# Allegro board F407_BIKE_V10A.brd
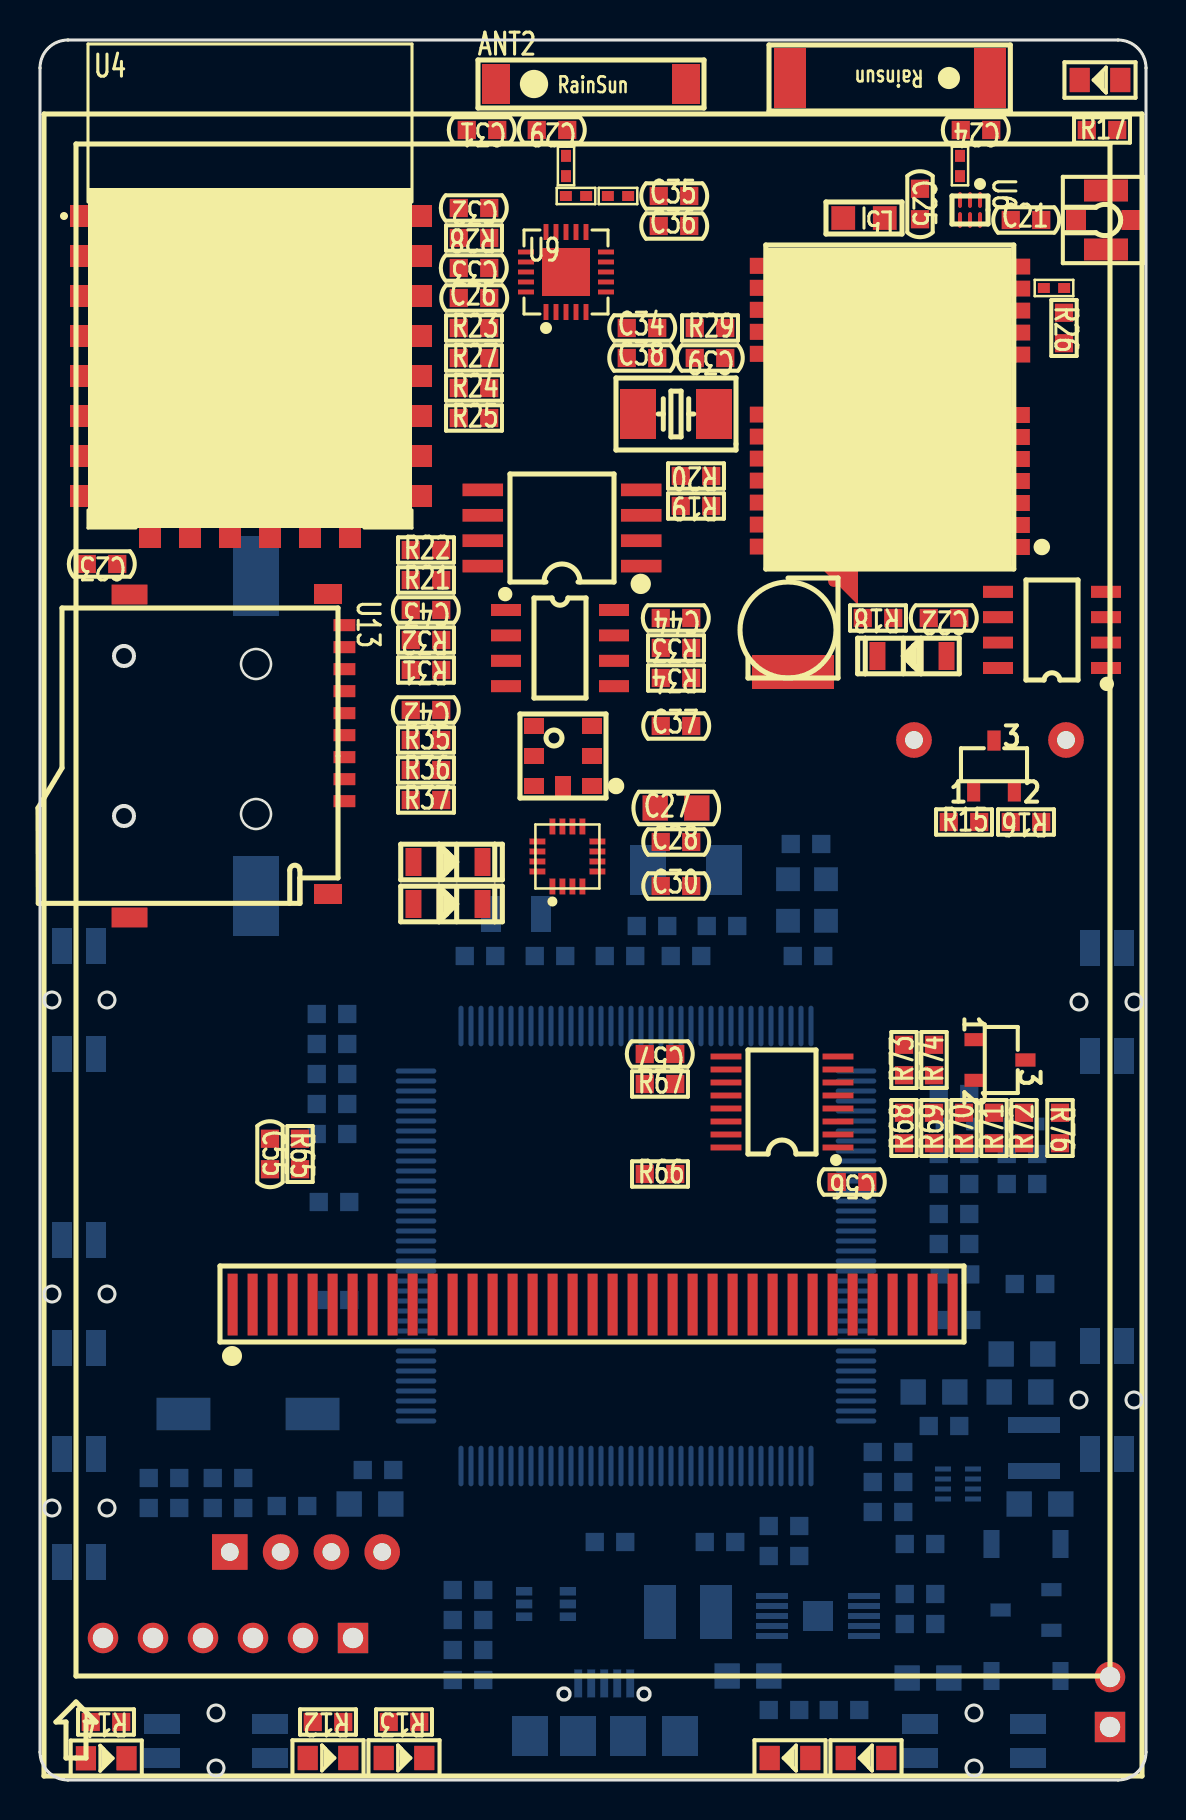
[diagram p0: board, top side]
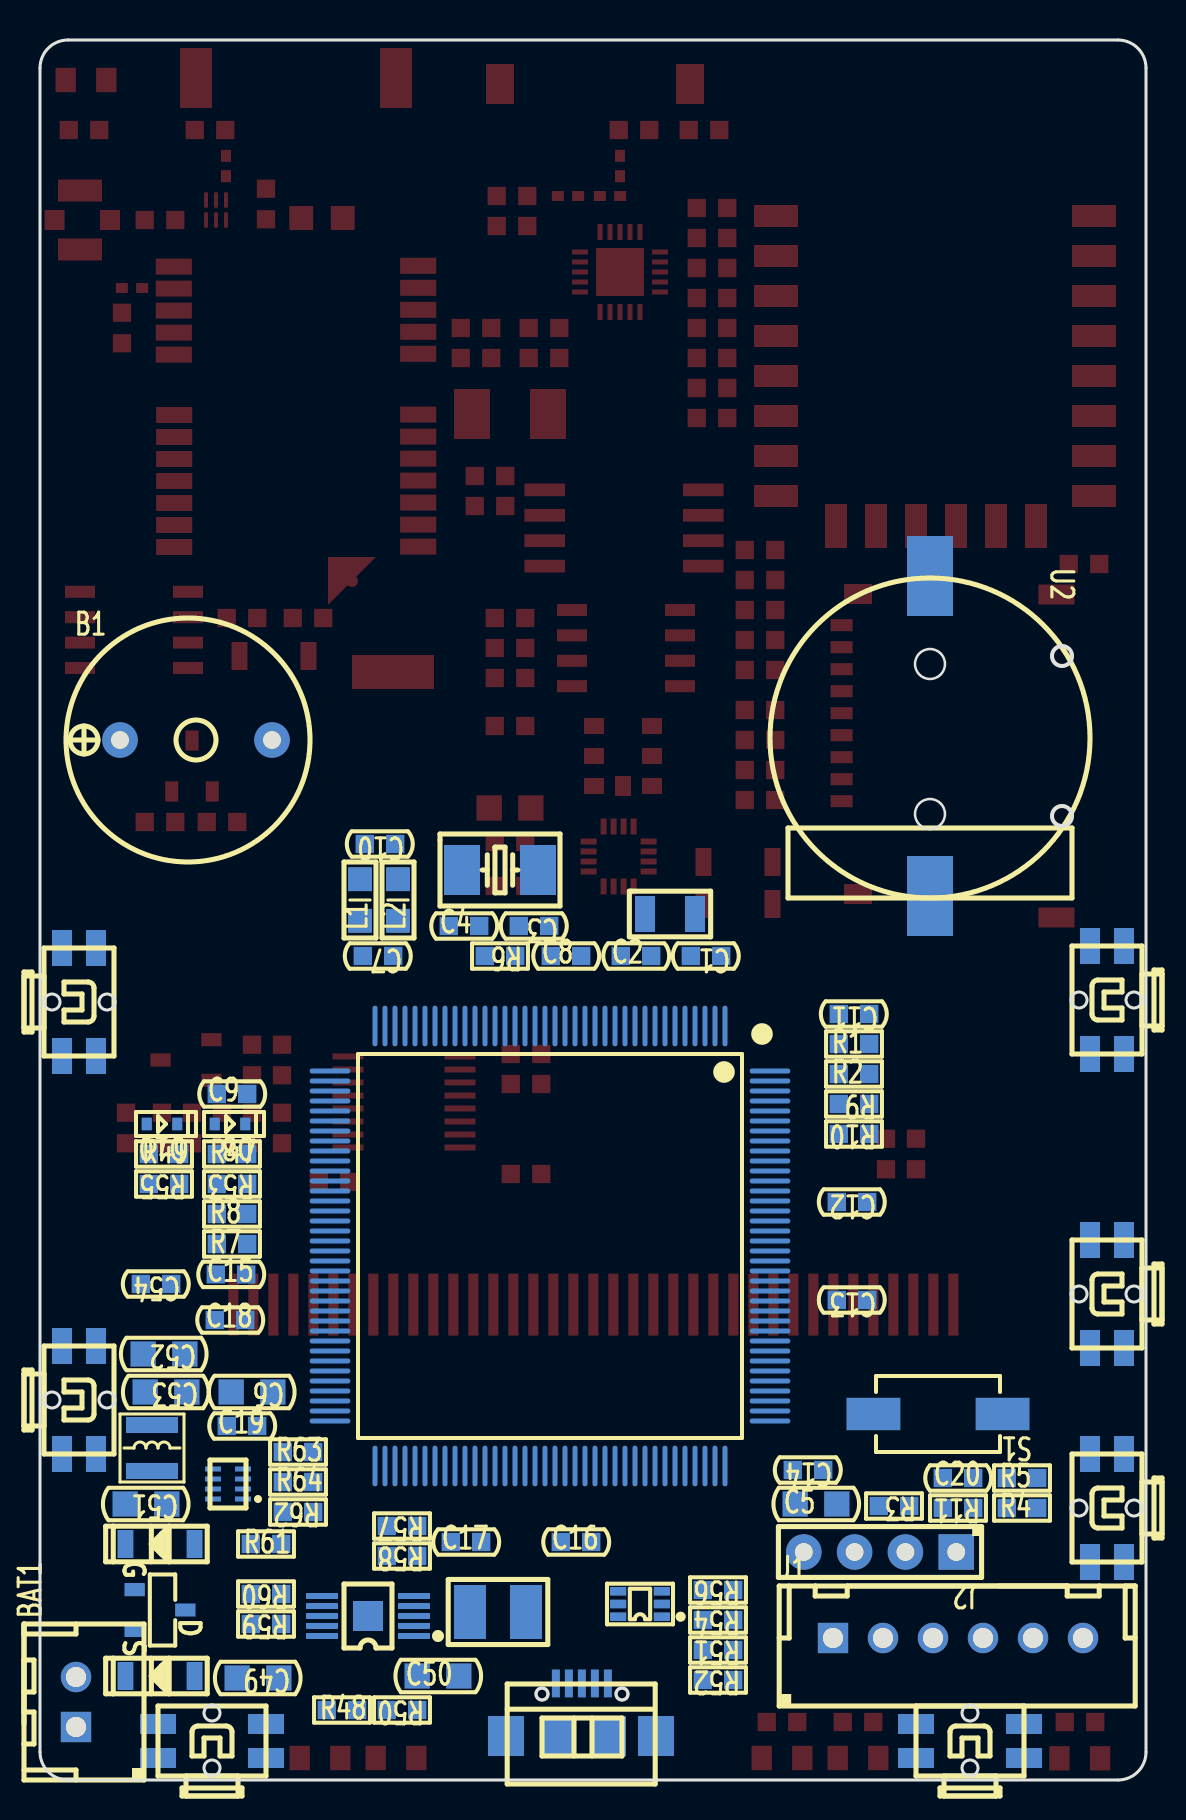
[diagram p1: board, bottom side, seen from below]

Outline 55.3 x 87 mm; copper layers: TOP, BOTTOM. Coordinates in mm from the lower left corner of the outline.
Outline path: 0,85.6 arc(0.41,86.59) 1.4,87 53.9,87 arc(54.89,86.59) 55.3,85.6 55.3,1.4 arc(54.89,0.41) 53.9,0 1.4,0 arc(0.41,0.41) 0,1.4 0,85.6

## Design rules (mm)
constraint set DEFAULT: min track width 0.203, pair gap 0.203
net group DP11: nets USART3_RX USART3_TX
net group DP12: nets USB_D+ USB_D-

## Placement (name value [footprint] x y rotation side)
ANT1  -  [GPS1003-1575]  47.5 85.1 180 top
ANT2  AN9520-245  [AN9520]  22.8 84.8 0 top
B1  BEEP  [BEEP_12X7R6]  51.3 52 180 bottom
BAT1  BATTERY  [XHB-2A]  53.5 3.9 90 bottom
C1  12pF_50V  [CC0603]  22 41.2 0 bottom
C2  12pF_50V  [CC0603]  25.5 41.2 180 bottom
C3  20pF_50V  [CC0603]  30.6 42.7 0 bottom
C4  20pF_50V  [CC0603]  34.1 42.7 180 bottom
C5  10uF_25V  [CC0805]  16.5 13.8 180 bottom
C6  10uF_25V  [CC0805]  44.7 19.4 0 bottom
C7  0.1uF_50V  [CC0603]  38.4 41.2 0 bottom
C8  0.1uF_50V  [CC0603]  29 41.2 180 bottom
C9  0.1uF_50V  [CC0603]  45.7 34.3 180 bottom
C10  0.1uF_50V  [CC0603]  38.3 46.8 0 bottom
C11  0.1uF_50V  [CC0603]  14.6 38.3 0 bottom
C12  0.1uF_50V  [CC0603]  14.7 28.9 0 bottom
C13  0.1uF_50V  [CC0603]  14.7 24 0 bottom
C14  0.1uF_50V  [CC0603]  16.9 15.5 0 bottom
C15  0.1uF_50V  [CC0603]  45.75 25.28 180 bottom
C16  0.1uF_50V  [CC0603]  28.5 11.9 180 bottom
C17  0.1uF_50V  [CC0603]  34 11.9 180 bottom
C18  0.1uF_50V  [CC0603]  45.8 23 180 bottom
C19  0.1uF_50V  [CC0603]  45.2 17.7 180 bottom
C20  0.1uF_50V  [CC0603]  9.4 15.1 180 bottom
C21  8.2pF_50V  [CC0603]  49.3 78 0 top
C22  0.1uF_50V  [CC0603]  45.2 58.1 180 top
C23  0.1uF_50V  [CC0603]  3.1 60.8 180 top
C24  470pF_50V  [CC0603]  46.8 82.5 180 top
C25  0.1uF_50V  [CC0603]  44 78.8 270 top
C26  33nF_50V  [CC0603]  21.7 74.1 0 top
C27  10uF_25V  [CC0805]  31.8 48.6 0 top
C28  220nF_50V  [CC0603]  31.8 46.9 0 top
C29  4.7pF_50V  [CC0603]  25.6 82.5 180 top
C30  0.1uF_50V  [CC0603]  31.8 44.7 0 top
C31  4.7pF_50V  [CC0603]  22.1 82.5 180 top
C32  0.1uF_50V  [CC0603]  21.7 78.6 180 top
C33  0.1uF_50V  [CC0603]  21.7 75.6 180 top
C34  0.1uF_50V  [CC0603]  30.1 72.6 0 top
C35  2.2nF_50V  [CC0603]  31.7 79.2 0 top
C36  4.7pF_50V  [CC0603]  31.7 77.7 0 top
C37  0.1uF_50V  [CC0603]  31.8 52.7 0 top
C38  20pF_50V  [CC0603]  30.1 71.1 0 top
C39  20pF_50V  [CC0603]  33.5 71.1 180 top
C42  0.1uF_50V  [CC0603]  19.3 53.5 180 top
C43  0.1uF_50V  [CC0603]  19.3 58.5 180 top
C44  0.1uF_50V  [CC0603]  31.8 58.1 180 top
C49  10uF_25V  [CC0805]  44.4 5.1 0 bottom
C50  10uF_25V  [CC0805]  35.4 5.2 180 bottom
C51  10uF_25V  [CC0805]  50 13.8 0 bottom
C52  10uF_25V  [CC0805]  49.1 21.3 0 bottom
C53  10uF_25V  [CC0805]  49 19.4 0 bottom
C54  0.1uF_50V  [CC0603]  49.5 24.8 0 bottom
C55  0.1uF_50V  [CC0603]  11.5 31.3 270 top
C56  0.1uF_50V  [CC0603]  40.6 29.9 180 top
C57  0.1uF_50V  [CC0603]  31 36.3 180 top
D1  1N4148W-TP  [SOD-123]  18.8 43.8 0 top
D2  1N4148W-TP  [SOD-123]  18.8 45.9 0 top
D3  LED_RED  [LED0805]  14.4 1.1 0 top
D4  LED_RED  [LED0805]  18.2 1.1 0 top
D5  LED_RED  [LED0805]  3.31 1.09 0 top
D6  1N4148W-TP  [SOD-123]  45.2 56.2 180 top
D7  LED_RED  [LED0805]  53 85 180 top
D8  PESD3V3SIUB  [SOD-523]  45.8 32.8 0 bottom
D9  LED_RED  [LED0805]  41.3 1.1 180 top
D10  PESD3V3SIUB  [SOD-523]  49.2 32.8 0 bottom
D11  LED_GREEN  [LED0805]  37.5 1.1 180 top
D12  LMBR130FT1G  [SOD-123]  47.7 5.2 0 bottom
D13  LMBR130FT1G  [SOD-123]  47.7 11.8 0 bottom
F1  SMD1210-6V2A  [SMD-1210]  32.4 8.4 0 bottom
IPX1  IPEX  [IPEX3]  53.3 78 270 top
J1  -  [XH-6A]  9.4 7.1 180 bottom
J2  HEADER4X1_2R54/NI  [HEADER4X1_2R54]  13.3 11.4 0 bottom
L1  BEAD_BLM21PG600  [LC0805]  39.3 44 90 bottom
L2  BEAD_BLM21PG600  [LC0805]  37.4 44 90 bottom
L3  27nH  [LC0402]  50.7 74.6 0 top
L4  6.8nH  [LC0402]  46 80.7 270 top
L5  BEAD_BLM21PG600  [LC0805]  41.2 78.1 180 top
L6  3.9nH  [LC0402]  26.3 80.7 90 top
L7  8.2nH  [LC0402]  26.8 79.2 180 top
L8  2.7nH  [LC0402]  28.9 79.2 0 top
L9  SWPA3015S2R2NT  [L3015]  49.7 16.6 90 bottom
Q1  S8050_NPN  [SOT23_123]  47.7 50.7 0 top
Q3  AO3401A  [SOT23_GSD]  49.3 8.5 270 bottom
Q4  S8050  [SOT23_123]  48 36 270 top
R1  0R/NI  [RC0603]  14.6 36.8 180 bottom
R2  0R  [RC0603]  14.6 35.3 180 bottom
R3  0R/NI  [RC0603]  12.6 13.7 0 bottom
R4  0R  [RC0603]  6.2 13.6 180 bottom
R5  0R  [RC0603]  6.2 15.1 180 bottom
R6  1M  [RC0603]  32.3 41.2 0 bottom
R7  10K/NI  [RC0603]  45.7 26.8 180 bottom
R8  10K/NI  [RC0603]  45.7 28.3 180 bottom
R9  10K/NI  [RC0603]  14.6 33.8 0 bottom
R10  10K  [RC0603]  14.6 32.3 0 bottom
R11  10K  [RC0603]  9.4 13.6 0 bottom
R12  1K  [RC0603]  14.4 2.9 180 top
R13  1K  [RC0603]  18.2 2.9 180 top
R14  1K  [RC0603]  3.3 2.9 180 top
R15  1K  [RC0603]  46.2 47.9 0 top
R16  47K  [RC0603]  49.3 47.9 180 top
R17  510R  [RC0603]  53.1 82.5 0 top
R18  120R  [RC0603]  41.9 58.1 180 top
R19  510R  [RC0603]  32.8 63.7 180 top
R20  510R  [RC0603]  32.8 65.2 180 top
R21  10K  [RC0603]  19.3 60 0 top
R22  10K  [RC0603]  19.3 61.5 0 top
R23  10K  [RC0603]  21.7 72.6 0 top
R24  10K  [RC0603]  21.7 69.6 0 top
R25  10K  [RC0603]  21.7 68.1 0 top
R26  10R  [RC0603]  51.2 72.6 270 top
R27  10K  [RC0603]  21.7 71.1 0 top
R28  22K  [RC0603]  21.7 77.1 180 top
R29  1M  [RC0603]  33.5 72.6 0 top
R31  4.7K  [RC0603]  19.3 55.5 180 top
R32  4.7K  [RC0603]  19.3 57 180 top
R33  4.7K  [RC0603]  31.8 56.6 180 top
R34  4.7K  [RC0603]  31.8 55.1 180 top
R35  4.7K  [RC0603]  19.3 52 0 top
R36  4.7K  [RC0603]  19.3 50.5 0 top
R37  4.7K  [RC0603]  19.3 49 0 top
R47  200K  [RC0603]  45.7 31.3 180 bottom
R48  1.5K  [RC0603]  40.2 3.5 180 bottom
R49  200K  [RC0603]  49.1 31.3 180 bottom
R50  1.5K  [RC0603]  37.2 3.5 0 bottom
R51  1.5K  [RC0603]  21.4 6.5 0 bottom
R52  100K  [RC0603]  21.4 5 0 bottom
R53  200K  [RC0603]  45.7 29.8 0 bottom
R54  10R  [RC0603]  21.4 8 0 bottom
R55  200K  [RC0603]  49.1 29.8 0 bottom
R56  10R  [RC0603]  21.4 9.5 0 bottom
R57  540R  [RC0603]  37.2 12.7 0 bottom
R58  2K  [RC0603]  37.2 11.2 0 bottom
R59  10K  [RC0603]  44 7.8 0 bottom
R60  10K  [RC0603]  44 9.3 0 bottom
R61  100K  [RC0603]  44 11.8 180 bottom
R62  10K  [RC0603]  42.4 13.4 0 bottom
R63  200K  [RC0603]  42.4 16.4 180 bottom
R64  44.2K  [RC0603]  42.4 14.9 180 bottom
R65  100K  [RC0603]  13 31.3 270 top
R66  100K  [RC0603]  31 30.3 0 top
R67  100K  [RC0603]  31 34.8 0 top
R68  10R  [RC0603]  43.2 32.6 90 top
R69  10R  [RC0603]  44.7 32.6 90 top
R70  10R  [RC0603]  46.2 32.6 90 top
R71  10R  [RC0603]  47.7 32.6 90 top
R72  10R  [RC0603]  49.2 32.6 90 top
R73  1K  [RC0603]  43.2 36 90 top
R74  100K  [RC0603]  44.7 36 90 top
R76  0R  [RC0603]  51 32.6 270 top
S1  KEY  [KEY_SMD_2]  10.4 18.3 0 bottom
SW2  SW  [SW-4P-5R4X4R5]  2.8 36.3 90 bottom
SW3  SW  [SW-4P-5R4X4R5]  2.8 21.6 90 bottom
SW4  SW  [SW-4P-5R4X4R5]  2.8 10.9 90 bottom
SW5  SW  [SW-4P-5R4X4R5]  11.5 2.8 180 bottom
SW6  SW  [SW-4P-5R4X4R5]  49.4 2.8 180 bottom
SW7  SW  [SW-4P-5R4X4R5]  52.5 21.7 270 bottom
SW8  SW  [SW-4P-5R4X4R5]  52.5 41.6 270 bottom
U1  STM32F407ZGT6  [LQFP-144]  29.8 26.7 270 bottom
U2  BATTERY  [CR1220]  10.8 52.2 270 bottom
U3  -  [NEO-6M]  42.5 68.7 0 top
U4  -  [ESP-12F]  10.5 74.7 0 top
U5  BATTERY_XH414  [BAT-XH414HG]  37.4 57.5 0 top
U6  MAX2659ELT+T  [UDFN-6]  46.5 78.5 270 top
U7  AT24C32D-SSHM-T  [SOIC8]  50.6 57.5 90 top
U8  HMC5883L  [TQFN-3X3-16]  26.37 46.18 0 top
U9  NRF24L01P-R  [QFN-20-4X4-0R5]  26.3 75.4 0 top
U10  -  [BMP180]  27.6 49.7 90 top
U12  W25Q128FVSIG  [SOIC-8_208]  26.1 62.6 90 top
U13  -  [TFCARD]  14.9 51.2 270 top
U14  AT24C512C-SSHM-T  [SOIC8]  26 56.6 270 top
U17  NUP4202W1T2G  [SOT-363]  25.3 8.8 90 bottom
U18  BQ24090DGQR  [HVSSOP-10]  38.9 8.2 90 bottom
U19  MP2162GQH-Z  [QFN-8]  45.9 14.8 0 bottom
U20  -  [TFT-3R5]  0.3 0.3 0 top
U21  XPT2046  [TSSOP-16]  37.1 33.9 90 top
USB1  -  [USB-MICRO]  28.2 4.9 180 bottom
X1  XTAL_32768Hz_3215  [X-2P-3R2X1R5-SMD]  23.8 43.3 180 bottom
X2  XTAL_8MHz_5032  [X-2P-5R0X3R2-SMD]  32.3 45.5 180 bottom
X3  XTAL_16MHz_5032  [X-2P-5R0X3R2-SMD]  31.8 68.3 180 top

## Library data of the parts
ANT1 ANT2 = AN9520-245
B1 = BEEP_HC12085P
BAT1 U2 U5 = BATTERY
C1-C4 C7-C19 C21 C24 C25 C38 C39 C42-C44 C54-C57 = CAP NP
C5 C6 C20 = C_Generic
C22 C23 C26-C37 C49-C53 = CAP NP_2
D1 D2 D12 D13 = DIODE13_0
D3-D5 D7 D9 D11 = LED_4
D6 = DIODE13_7
D8 D10 = PESD3V3S1UB_1
F1 = FUSE
IPX1 = IPEX_1
J1 = CONN RCPT 6
J2 = CONN RCPT 4
L1 L2 L5 = IND_BEAD_0805_600OHM_200MA
L3 L4 L6-L8 = INDUCTOR
L9 = IND_BEAD_0805_600OHM_1
Q1 Q4 = L14G1/TO_1
Q3 = MOS-P
R1 R2 = R_10k_0603
R3-R29 R31-R37 R47-R74 R76 = R_Generic
S1 = SW PUSHBUTTON_0
SW2-SW8 = SWITCH-SPST-4P
U1 = STM32F407ZGT6_0
U3 = NEO-6M
U4 = ESP-12F
U6 = MAX2659ELT+T
U7 = AT24Cxx
U8 = HMC5883
U9 = NRF24L01P-R
U10 = BMP180
U12 = W25Qxx
U13 = TFCARD_1
U14 = AT24C512
U17 = nup2202w1_D_2
U18 = BQ24090
U19 = MP2162GQH-Z
U20 = TFT-3R2
U21 = XPT2046
USB1 = USB-MICRO
X1-X3 = XTAL_5032_0

## Footprints (pads in the part's own frame, mm; a bottom-side part is the same pattern mirrored in y, then rotated)
AN9520
  rect 1.4x2 smd: 1(0,0) 2(9.5,0)
BAT-XH414HG
  custom 2.4x2.4 smd: 1(2.3,2.45)
  rect 4.1x1.7 smd: 2(0.25,-2.1)
BEEP_12X7R6
  round 1.778 hole 0.889: 1(0,0) 2(7.6,0)
BMP180
  rect 0.8x1 smd: 1(0,0) 2(1.5,0) 3(3,0) 4(3,2.9) 5(1.5,2.9) 6(0,2.9)
  rect 1x0.8 smd: 7(0,1.45)
CC0603
  rect 0.914x0.914 smd: 1(-0.762,0) 2(0.762,0)
CC0805
  rect 1.27x1.27 smd: 1(-1.041,0) 2(1.041,0)
CR1220
  rect 4x2.3 smd: 1(8,0) 2(-8,0)
ESP-12F
  rect 2.2x1.1 smd: 1(-7.9,3.5) 2(-7.9,1.5) 3(-7.9,-0.5) 4(-7.9,-2.5) 5(-7.9,-4.5) 6(-7.9,-6.5) 7(-7.9,-8.5) 8(-7.9,-10.5) 15(8,-10.5) 16(8,-8.5) 17(8,-6.5) 18(8,-4.5) 19(8,-2.5) 20(8,-0.5) 21(8,1.5) 22(8,3.5)
  rect 1.1x2.2 smd: 9(-5,-12) 10(-3,-12) 11(-1,-12) 12(1,-12) 13(3,-12) 14(5,-12)
GPS1003-1575
  rect 1.6x3 smd: 1(0,0) 2(10,0)
HEADER4X1_2R54
  rect 1.778x1.778 hole 0.889: 1(-3.81,0)
  round 1.778 hole 0.889: 2(-1.27,0) 3(1.27,0) 4(3.81,0)
HVSSOP-10
  rect 0.3x1.6 smd: 1(-1,-2.3) 2(-0.5,-2.3) 3(0,-2.3) 4(0.5,-2.3) 5(1,-2.3) 6(1,2.3) 7(0.5,2.3) 8(0,2.3) 9(-0.5,2.3) 10(-1,2.3)
  rect 1.5x1.5 smd: 11(0,0)
IPEX3
  rect 1x1 smd: 1(0,-1.501) 3(0,1.27)
  rect 1.1x2.2 smd: 2(1.473,0) 4(-1.473,0)
KEY_SMD_2
  rect 2.692x1.626 smd: 1(-3.23,0) 2(3.23,0)
L3015
  rect 0.8x2.6 smd: 1(-1.15,0) 2(1.15,0)
LC0402
  rect 0.6x0.5 smd: 1(-0.508,0) 2(0.508,0)
LC0805
  rect 1.194x1.194 smd: 1(-1.041,0) 2(1.041,0)
LED0805
  rect 1.016x1.219 smd: 1(-1.016,0) 2(1.016,0)
LQFP-144
  oval 2.032x0.254 smd: 1(-11,8.75) 2(-11,8.25) 3(-11,7.75) 4(-11,7.25) 5(-11,6.75) 6(-11,6.25) 7(-11,5.75) 8(-11,5.25) 9(-11,4.75) 10(-11,4.25) 11(-11,3.75) 12(-11,3.25) 13(-11,2.75) 14(-11,2.25) 15(-11,1.75) 16(-11,1.25) 17(-11,0.75) 18(-11,0.25) 19(-11,-0.25) 20(-11,-0.75) 21(-11,-1.25) 22(-11,-1.75) 23(-11,-2.25) 24(-11,-2.75) 25(-11,-3.25) 26(-11,-3.75) 27(-11,-4.25) 28(-11,-4.75) 29(-11,-5.25) 30(-11,-5.75) 31(-11,-6.25) 32(-11,-6.75) 33(-11,-7.25) 34(-11,-7.75) 35(-11,-8.25) 36(-11,-8.75) 73(11,-8.75) 74(11,-8.25) 75(11,-7.75) 76(11,-7.25) 77(11,-6.75) 78(11,-6.25) 79(11,-5.75) 80(11,-5.25) 81(11,-4.75) 82(11,-4.25) 83(11,-3.75) 84(11,-3.25) 85(11,-2.75) 86(11,-2.25) 87(11,-1.75) 88(11,-1.25) 89(11,-0.75) 90(11,-0.25) 91(11,0.25) 92(11,0.75) 93(11,1.25) 94(11,1.75) 95(11,2.25) 96(11,2.75) 97(11,3.25) 98(11,3.75) 99(11,4.25) 100(11,4.75) 101(11,5.25) 102(11,5.75) 103(11,6.25) 104(11,6.75) 105(11,7.25) 106(11,7.75) 107(11,8.25) 108(11,8.75)
  oval 0.254x2.032 smd: 37(-8.75,-11) 38(-8.25,-11) 39(-7.75,-11) 40(-7.25,-11) 41(-6.75,-11) 42(-6.25,-11) 43(-5.75,-11) 44(-5.25,-11) 45(-4.75,-11) 46(-4.25,-11) 47(-3.75,-11) 48(-3.25,-11) 49(-2.75,-11) 50(-2.25,-11) 51(-1.75,-11) 52(-1.25,-11) 53(-0.75,-11) 54(-0.25,-11) 55(0.25,-11) 56(0.75,-11) 57(1.25,-11) 58(1.75,-11) 59(2.25,-11) 60(2.75,-11) 61(3.25,-11) 62(3.75,-11) 63(4.25,-11) 64(4.75,-11) 65(5.25,-11) 66(5.75,-11) 67(6.25,-11) 68(6.75,-11) 69(7.25,-11) 70(7.75,-11) 71(8.25,-11) 72(8.75,-11) 109(8.75,11) 110(8.25,11) 111(7.75,11) 112(7.25,11) 113(6.75,11) 114(6.25,11) 115(5.75,11) 116(5.25,11) 117(4.75,11) 118(4.25,11) 119(3.75,11) 120(3.25,11) 121(2.75,11) 122(2.25,11) 123(1.75,11) 124(1.25,11) 125(0.75,11) 126(0.25,11) 127(-0.25,11) 128(-0.75,11) 129(-1.25,11) 130(-1.75,11) 131(-2.25,11) 132(-2.75,11) 133(-3.25,11) 134(-3.75,11) 135(-4.25,11) 136(-4.75,11) 137(-5.25,11) 138(-5.75,11) 139(-6.25,11) 140(-6.75,11) 141(-7.25,11) 142(-7.75,11) 143(-8.25,11) 144(-8.75,11)
NEO-6M
  rect 1.8x0.8 smd: 1(6.09,-7.05) 2(6.09,-5.95) 3(6.09,-4.85) 4(6.09,-3.75) 5(6.09,-2.65) 6(6.09,-1.55) 7(6.09,-0.45) 8(6.11,2.57) 9(6.11,3.67) 10(6.11,4.77) 11(6.11,5.87) 12(6.11,6.97) 13(-6.11,7.01) 14(-6.11,5.91) 15(-6.11,4.81) 16(-6.11,3.71) 17(-6.11,2.61) 18(-6.11,-0.43) 19(-6.11,-1.53) 20(-6.11,-2.63) 21(-6.11,-3.73) 22(-6.11,-4.83) 23(-6.11,-5.93) 24(-6.11,-7.03)
QFN-8
  rect 0.8x0.25 smd: 1(-0.75,0.75) 2(-0.75,0.25) 3(-0.75,-0.25) 4(-0.75,-0.75) 5(0.75,-0.75) 6(0.75,-0.25) 7(0.75,0.25) 8(0.75,0.75)
QFN-20-4X4-0R5
  rect 0.25x0.8 smd: 1(-1,-2) 2(-0.5,-2) 3(0,-2) 4(0.5,-2) 5(1,-2) 11(1,2) 12(0.5,2) 13(0,2) 14(-0.5,2) 15(-1,2)
  rect 0.8x0.25 smd: 6(2,-1) 7(2,-0.5) 8(2,0) 9(2,0.5) 10(2,1) 16(-2,1) 17(-2,0.5) 18(-2,0) 19(-2,-0.5) 20(-2,-1)
  rect 2.4x2.4 smd: 21(0,0)
RC0603
  rect 0.914x0.914 smd: 1(-0.762,0) 2(0.762,0)
SMD-1210
  rect 1.6x2.7 smd: 1(-1.4,0) 2(1.4,0)
SOD-123
  rect 0.8x1.4 smd: 1(-0.127,0) 2(3.327,0)
SOD-523
  rect 0.508x0.635 smd: 1(0.762,0) 2(-0.762,0)
SOIC8
  rect 0.6x1.5 smd: 1(-1.9,-2.7) 2(-0.63,-2.7) 3(0.64,-2.7) 4(1.91,-2.7) 5(1.91,2.7) 6(0.64,2.7) 7(-0.63,2.7) 8(-1.9,2.7)
SOIC-8_208
  rect 0.635x2.032 smd: 1(-1.905,-3.962) 2(-0.635,-3.962) 3(0.635,-3.962) 4(1.905,-3.962) 5(1.905,3.962) 6(0.635,3.962) 7(-0.635,3.962) 8(-1.905,3.962)
SOT23_123
  rect 0.66x1.016 smd: 1(-1.016,-1.27) 2(1.016,-1.27) 3(0,1.27)
SOT23_GSD
  rect 0.66x1.016 smd: 1(-1.016,-1.27) 2(1.016,-1.27) 3(0,1.27)
SOT-363
  rect 0.432x0.813 smd: 1(-0.635,-1.092) 2(0,-1.092) 3(0.635,-1.092) 4(0.635,1.092) 5(0,1.092) 6(-0.635,1.092)
SW-4P-5R4X4R5
  rect 1.8x1 smd: 1(0,0) 2(5.4,0) 3(0,-1.7) 4(5.4,-1.7)
TFCARD
  rect 0.6x1.1 smd: 1(2.26,0.32) 2(1.16,0.32) 3(0.06,0.32) 4(-1.04,0.32) 5(-2.14,0.32) 6(-3.24,0.32) 7(-4.34,0.32) 8(-5.44,0.32) 9(-6.54,0.32)
  rect 1x1.4 smd: 10(-8.1,-0.5) 13(6.9,-0.5)
  rect 1x1.8 smd: 11(-8.074,-10.422) 12(8.074,-10.422)
TFT-3R5
  rect 0.508x3.099 smd: 1(9.33,23.47) 2(10.33,23.47) 3(11.33,23.47) 4(12.33,23.47) 5(13.33,23.47) 6(14.33,23.47) 7(15.33,23.47) 8(16.33,23.47) 9(17.33,23.47) 10(18.33,23.47) 11(19.33,23.47) 12(20.33,23.47) 13(21.33,23.47) 14(22.33,23.47) 15(23.33,23.47) 16(24.33,23.47) 17(25.33,23.47) 18(26.33,23.47) 19(27.33,23.47) 20(28.33,23.47) 21(29.33,23.47) 22(30.33,23.47) 23(31.33,23.47) 24(32.33,23.47) 25(33.33,23.47) 26(34.33,23.47) 27(35.33,23.47) 28(36.33,23.47) 29(37.33,23.47) 30(38.33,23.47) 31(39.33,23.47) 32(40.33,23.47) 33(41.33,23.47) 34(42.33,23.47) 35(43.33,23.47) 36(44.33,23.47) 37(45.33,23.47)
TQFN-3X3-16
  rect 0.3x0.8 smd: 1(-0.75,-1.5) 2(-0.25,-1.5) 3(0.25,-1.5) 4(0.75,-1.5) 9(0.75,1.5) 10(0.25,1.5) 11(-0.25,1.5) 12(-0.75,1.5)
  rect 0.8x0.3 smd: 5(1.5,-0.75) 6(1.5,-0.25) 7(1.5,0.25) 8(1.5,0.75) 13(-1.5,0.75) 14(-1.5,0.25) 15(-1.5,-0.25) 16(-1.5,-0.75)
TSSOP-16
  rect 0.3x1.55 smd: 1(-2.275,-2.8) 2(-1.625,-2.8) 3(-0.975,-2.8) 4(-0.325,-2.8) 5(0.325,-2.8) 6(0.975,-2.8) 7(1.625,-2.8) 8(2.275,-2.8) 9(2.275,2.8) 10(1.625,2.8) 11(0.975,2.8) 12(0.325,2.8) 13(-0.325,2.8) 14(-0.975,2.8) 15(-1.625,2.8) 16(-2.275,2.8)
UDFN-6
  oval 0.8x0.2 smd: 1(-0.5,0.5) 2(-0.5,0) 3(-0.5,-0.5) 4(0.5,-0.5) 5(0.5,0) 6(0.5,0.5)
USB-MICRO
  rect 0.4x1.4 smd: 1(-1.31,-0.07) 2(-0.66,-0.07) 3(-0.01,-0.07) 4(0.64,-0.07) 5(1.29,-0.07)
  rect 1.8x2 smd: 6(-3.8,-2.7) 7(-1.2,-2.7) 8(1.3,-2.7) 9(3.7,-2.7)
X-2P-3R2X1R5-SMD
  rect 1x1.8 smd: 1(-1.25,0) 2(1.25,0)
X-2P-5R0X3R2-SMD
  rect 1.8x2.5 smd: 1(-1.9,0) 2(1.9,0)
XH-6A
  rect 1.524x1.524 hole 1.016: 1(-6.25,0)
  round 1.524 hole 1.016: 2(-3.75,0) 3(-1.25,0) 4(1.25,0) 5(3.75,0) 6(6.25,0)
XHB-2A
  rect 1.524x1.524 hole 1.016: 1(-1.25,0)
  round 1.524 hole 1.016: 2(1.25,0)

## Nets
GND: BAT1.2 C1.1 C2.1 C3.1 C4.1 C5.2 C6.2 C8.1 C9.1 C10.1 C11.1 C12.1 C13.1 C14.1 C15.1 C16.1 C17.1 C18.1 C19.1 C20.2 C22.2 C23.2 C25.1 C26.1 C27.2 C30.2 C31.2 C32.2 C33.2 C34.2 C35.2 C36.2 C37.2 C38.1 C39.1 C42.1 C43.2 C44.1 C49.2 C50.2 C51.2 C52.2 C53.2 C54.2 C55.1 C56.1 C57.2 D5.2(CATHODE) D8.1 D10.1 IPX1.2 IPX1.4 J1.1 J2.1 L2.2(B) Q1.2(E) Q4.2(E) R1.2 R8.1 R10.1 R16.1 R28.2 R47.1 R49.1 R52.1 R57.2 R58.2 R59.2 R60.2 R61.2 R64.2 R74.1 S1.1 SW3.3 SW3.4 SW4.3 SW4.4 SW5.3 SW5.4 SW6.3 SW6.4 SW7.3 SW7.4 SW8.3 SW8.4 U1.16 U1.38 U1.51 U1.61 U1.83 U1.94 U1.107 U1.120 U1.130(VSS_9) U2.2 U3.7 U3.10 U3.12 U3.13 U3.24 U4.15 U5.2 U6.1 U6.2 U7.1 U7.2 U7.3 U7.4 U7.7(WP) U8.9 U8.11 U9.8 U9.14 U9.17 U9.20 U9.21 U10.7 U12.4 U13.6 U14.1 U14.2 U14.3 U14.4 U14.7(WP) U17.2 U18.3(VSS) U18.11 U19.3 U19.5 U20.1 U20.25 U20.37 U21.6 U21.7 U21.8 USB1.5 USB1.6 USB1.7 USB1.8 USB1.9
VBAT: BAT1.1 C49.1 D12.1 Q3.3 R48.2 R50.2 R55.2 U18.10
VCC_3.3V: C55.2 C56.2 C57.1 R65.1 R66.1 R67.1 R76.1 U20.2 U20.3 U21.1 U21.9 U21.10
VCC_3V3: B1.1(P) C8.2 C9.2 C10.2 C11.2 C12.2 C13.2 C14.2 C15.2 C16.2 C17.2 C18.2 C19.2 C22.1 C23.1 C30.1 C32.1 C33.1 C34.1 C37.1 C42.2 C43.1 C44.2 C52.1 C53.1 C54.1 D1.1 D6.1 J2.2 L1.2(B) L5.2(B) L9.2(B) R2.2 R3.1 R7.1 R9.1 R11.1 R12.1 R13.1 R14.1 R17.1 R21.2 R22.2 R23.2 R24.2 R25.2 R27.2 R31.1 R32.1 R33.1 R34.1 R35.2 R36.2 R37.2 R51.1 R63.1 SW2.3 SW2.4 U1.17 U1.30 U1.39 U1.52 U1.62 U1.72 U1.84 U1.95 U1.108 U1.121 U1.131 U1.144 U3.23 U4.8(VCC) U7.8 U8.2 U8.4 U8.13(VDDIO) U9.7 U9.15 U9.18 U10.2 U10.3(VDDIO) U12.3(W\P\) U12.7 U12.8 U13.4(VCC) U14.8 U17.5 U19.4
VCC_DCDC: C51.1 D12.2 D13.2 Q3.2(S) R62.1 U19.7(VIN)
VCC_USB: D13.1 F1.1 Q3.1 R61.1 USB1.1(VBUS)
VCC_VBAT: D1.2 D2.2 U1.6
VDDA: C7.2 L1.1 U1.32 U1.33
VSSA: C7.1 L2.1 U1.31
ADC_BAT: D10.2 R49.2 R55.1 U1.41
ADC_USB: D8.2 R47.2 R53.1 U1.42
BAT_#CHG1: D9.2(CATHODE) U18.8
BAT_#PG1: D11.2(CATHODE) U18.5
BEEP: R15.1 U1.20
BOOT0: R9.2 R10.2 U1.138
F_CS: U1.75 U12.1
FSMC_A0: U1.10
FSMC_A1: U1.11
FSMC_A2: U1.12
FSMC_A3: U1.13
FSMC_A4: U1.14
FSMC_A5: U1.15
FSMC_A6: U1.50 U20.5
FSMC_A7: U1.53
FSMC_A8: U1.54
FSMC_A9: U1.55
FSMC_A10: U1.56
FSMC_A11: U1.57
FSMC_A12: U1.87
FSMC_A13: U1.88
FSMC_A14: U1.89
FSMC_A15: U1.90
FSMC_A16: U1.80
FSMC_A17: U1.81
FSMC_A18: U1.82
FSMC_D0: U1.85 U20.9
FSMC_D1: U1.86 U20.10
FSMC_D2: U1.114 U20.11
FSMC_D3: U1.115 U20.12
FSMC_D4: U1.58 U20.13
FSMC_D5: U1.59 U20.14
FSMC_D6: U1.60 U20.15
FSMC_D7: U1.63 U20.16
FSMC_D8: U1.64 U20.17
FSMC_D9: U1.65 U20.18
FSMC_D10: U1.66 U20.19
FSMC_D11: U1.67 U20.20
FSMC_D12: U1.68 U20.21
FSMC_D13: U1.77 U20.22
FSMC_D14: U1.78 U20.23
FSMC_D15: U1.79 U20.24
FSMC_NBL0: U1.141
FSMC_NBL1: U1.142
FSMC_NE3: U1.125
FSMC_NE4: R65.2 U1.127 U20.4
FSMC_NOE: U1.118 U20.7
FSMC_NWE: U1.119 U20.6
GPS_PPS: D7.2(CATHODE) U1.19 U3.3
GPS_SCL: U3.19 U7.6
GPS_SDA: U3.18 U7.5
IIC_SCL: R33.2 U1.139 U8.1 U10.5 U14.6
IIC_SDA: R34.2 U1.140 U8.16 U10.6 U14.5
JTCK: R5.1 U1.109
JTMS: R4.1 U1.105
KEY0: SW3.1 SW3.2 U1.3
KEY1: SW5.1 SW5.2 U1.2
KEY2: SW7.1 SW7.2 U1.1
KEY3: SW8.1 SW8.2 U1.29
KEY4: SW6.1 SW6.2 U1.28
KEY5: SW4.1 SW4.2 U1.27
LCD_BL: R73.1 U1.76
LED0: D3.2(CATHODE) U1.21
LED1: D4.2(CATHODE) U1.22
LED-1: R68.1 U20.30
LED-2: R69.1 U20.31
LED-3: R70.1 U20.32
LED-4: R71.1 U20.33
LED-5: R72.1 U20.34
NRF_CE: U1.91 U9.1
NRF_CS: U1.92 U9.2
NRF_IRQ: U1.93 U9.6
OSC32_IN: C1.2 U1.8 X1.2
OSC32_OUT: C2.2 U1.9 X1.1
OSC_IN: C3.2 R6.1 U1.23 X2.2
OSC_OUT: C4.2 R6.2 U1.24 X2.1
RESET: C20.1 J1.3 R11.2 S1.2 U1.25 U20.8
SDIO_CMD: R35.1 U1.116 U13.3
SDIO_D0: R31.2 U1.98 U13.7
SDIO_D1: R32.2 U1.99 U13.8
SDIO_D2: R37.1 U1.111 U13.1
SDIO_D3: R36.1 U1.112 U13.2
SDIO_SCK: U1.113 U13.5
SPI1_MISO: U1.134 U9.5 U12.2
SPI1_MOSI: U1.135 U9.4 U12.5
SPI1_SCK: U1.133 U9.3 U12.6
SWCLK: J1.6 R5.2
SWDIO: J1.5 R4.2
T_BUSY: U21.13
T_CS: R66.2 U1.7 U21.15
T_MISO: R7.2 R8.2 U1.48 U21.12
T_MOSI: U1.49 U21.14
T_PEN: R67.2 U1.47 U21.11
T_SCK: U1.46 U21.16
USART1_RX: J2.4 U1.102
USART1_TX: J2.3 U1.101
USART2_RX: R27.1 U1.37 U4.22
USART2_TX: R23.1 U1.36 U4.21
USART3_RX: R20.2 U1.70
USART3_TX: R19.2 U1.69
USB_D+: R54.1 U1.104
USB_D-: R56.1 U1.103
WIFI_GPIO_0: R24.1 U1.26 U1.35 U4.18
WIFI_RST: R22.1 U1.18 U1.40 U4.1
WK_UP: SW2.1 SW2.2 U1.34
X+: U20.29 U21.2
X-: U20.27 U21.4
XC1: C39.2 R29.2 U9.10 X3.1
XC2: C38.2 R29.1 U9.9(XC2) X3.2
Y+: U20.28 U21.3(YP)
Y-: U20.26(Y-) U21.5
N11518043: R1.1 R2.1 U1.143
N11518115: C5.1 U1.106
N11560624: D3.1 R12.2
N11560628: D4.1 R13.2
N11623966: C6.1 U1.71
N13708484: Q1.1 R15.2 R16.2
N13708528: B1.2 Q1.3
N13727357: D5.1 R14.2
N16803474: R60.1 U18.7
N16803484: C50.1 F1.2 R53.2 U18.1
N16803543: R57.1 U18.2
N16803547: R58.1 U18.4
N16803588: D11.1 R50.1
N16803596: D9.1 R48.1
N16803637: R59.1 U18.9
N16805070: R62.2 U19.1
N16805086: L9.1 U19.6
N16805098: R63.2 R64.1 U19.2
N16805376: R51.2 R54.2 U17.1 U17.6 USB1.3
N16805400: R56.2 U17.3 U17.4 USB1.2
N16806238: R19.1 U3.21
N16806244: R20.1 U3.20
N16806252: C21.2 IPX1.1 L3.1 U3.11
N16806254: ANT1.1 C24.1
N16806301: L3.2 R26.1
N16806410: D7.1 R17.2
N16806432: R18.2 U3.22(V_BCKP) U5.1
N16806442: D6.2(CATHODE) R18.1
N16806516: R26.2 U3.8 U3.9
N16806572: C24.2 L4.1
N16806574: L4.2 U6.3
N16806596: C21.1 U6.6
N16806604: C25.2 L5.1 U6.4(VCC) U6.5
N16807337: C28.2 U8.8
N16807341: C28.1 U8.12
N16807345: C27.1 U8.10
N16810389: J1.2 R3.2
N16812881: R52.2 USB1.4
N16820795: C26.2 U9.19
N16821095: R28.1 U9.16
N16821257: L6.1 L7.2 U9.13
N16821271: L7.1 L8.1 U9.12
N16821737: C35.1 C36.1 L8.2 U9.11
N16821865: C29.1 L6.2
N16821868: ANT2.1 C29.2 C31.1
N16827167: R21.1 U4.3
N16828490: R25.1 U4.16
N16864742: Q4.3 R68.2 R69.2 R70.2 R71.2 R72.2
N16864868: Q4.1 R73.2 R74.2
N16864904: R76.2 U20.35 U20.36
N117249130: D2.1 U2.1

Pads without a net: ANT1 2; ANT2 2; IPX1 3; J1 4; U1 4 5 43 44 45 73 74 96 97 100 110 117 122 123 124 126 128 129 132 136 137; U3 1 2 4 5 6 14 15 16 17; U4 2 4 5 6 7 9 10 11 12 13 14 17 19 20; U8 3 5 6 7 14 15; U10 1 4; U13 9 10 11 12 13; U18 6; U19 8
